# Altium PCB Mini-F1C200s.PcbDoc
Units mil, origin at the board's own origin, x right, y up, seen from the top; angles counter-clockwise.
Board outline 2362.8 x 1181.7 mil, 4 copper layers (Top Layer, GND, SGN, Bottom Layer), stack 23.756 mil thick; 69 components, 59 nets, 366 pads, 0 vias.
Unrouted connection lines stored in the file: 188.
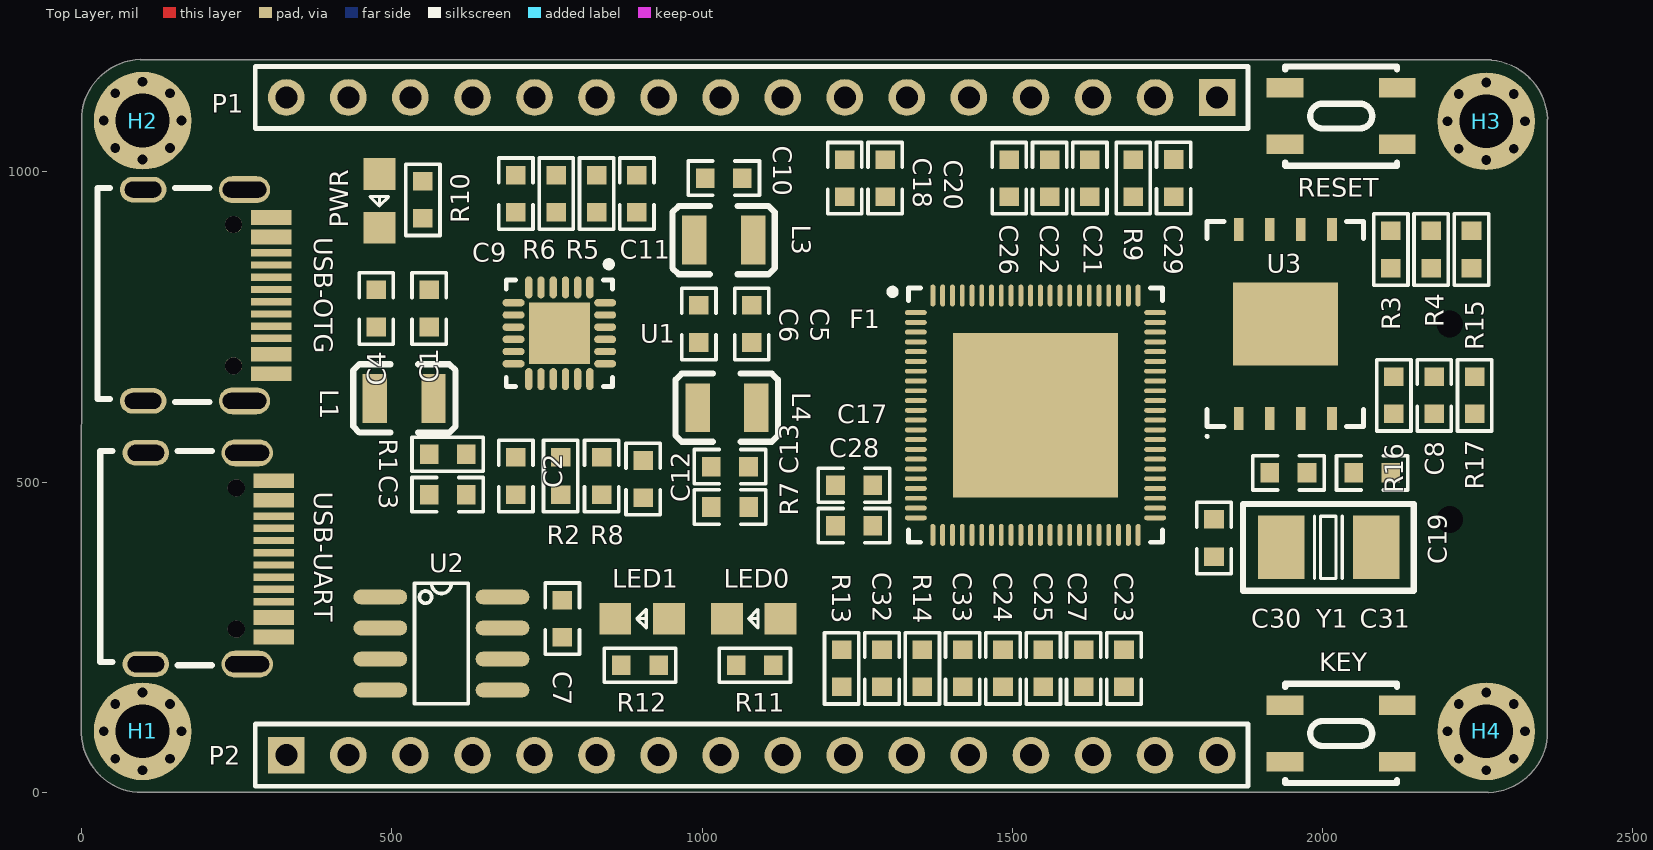
[diagram p0: Top Layer view]
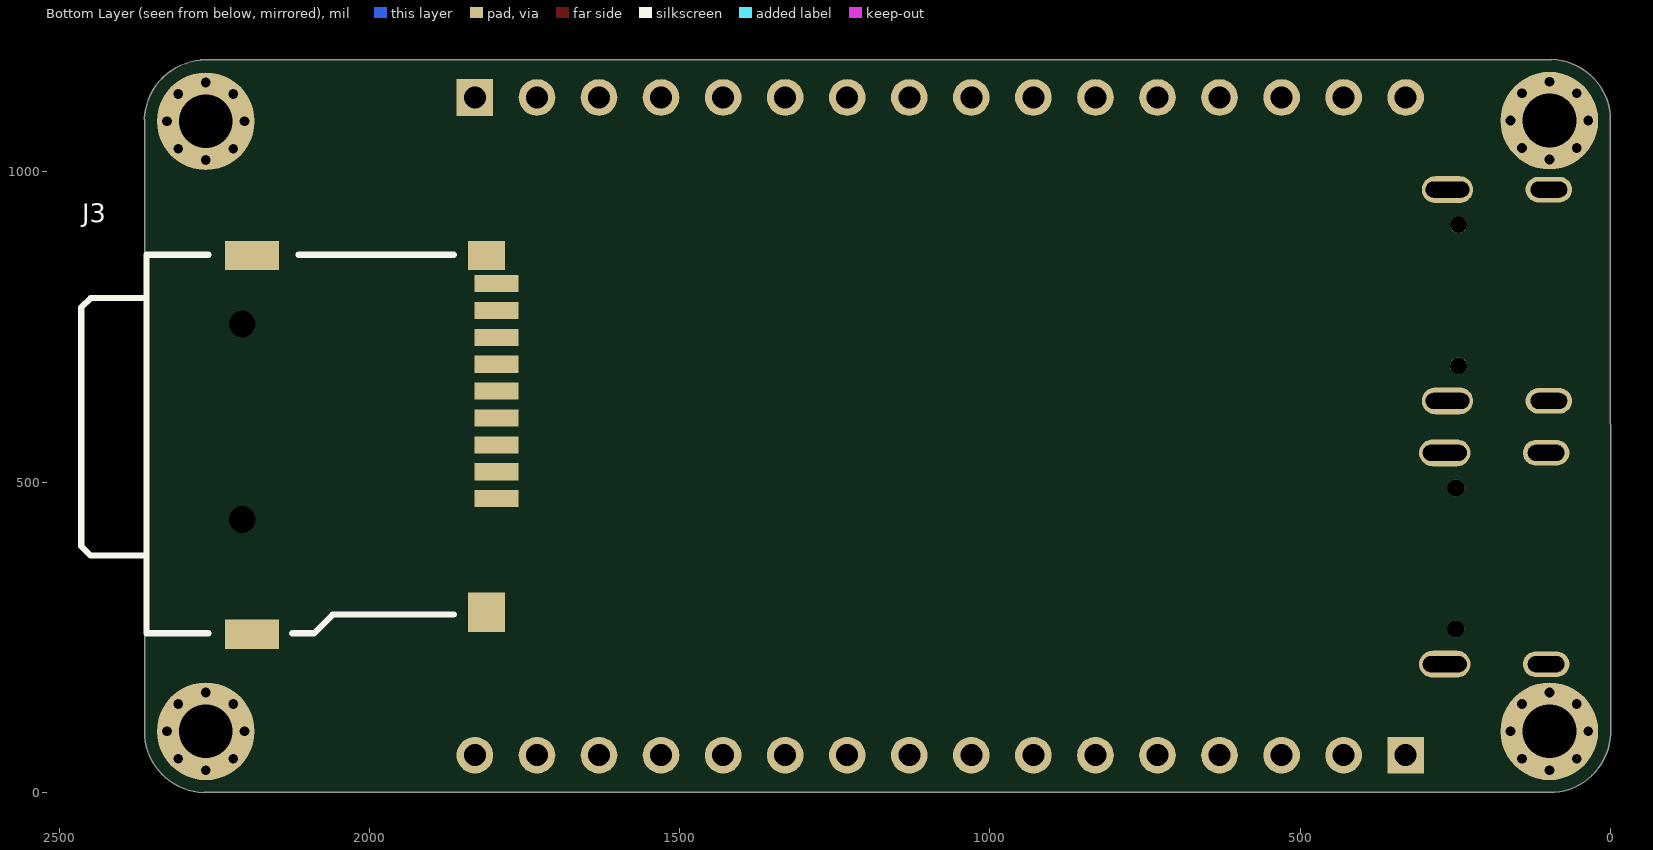
[diagram p1: Bottom Layer view, seen from below]
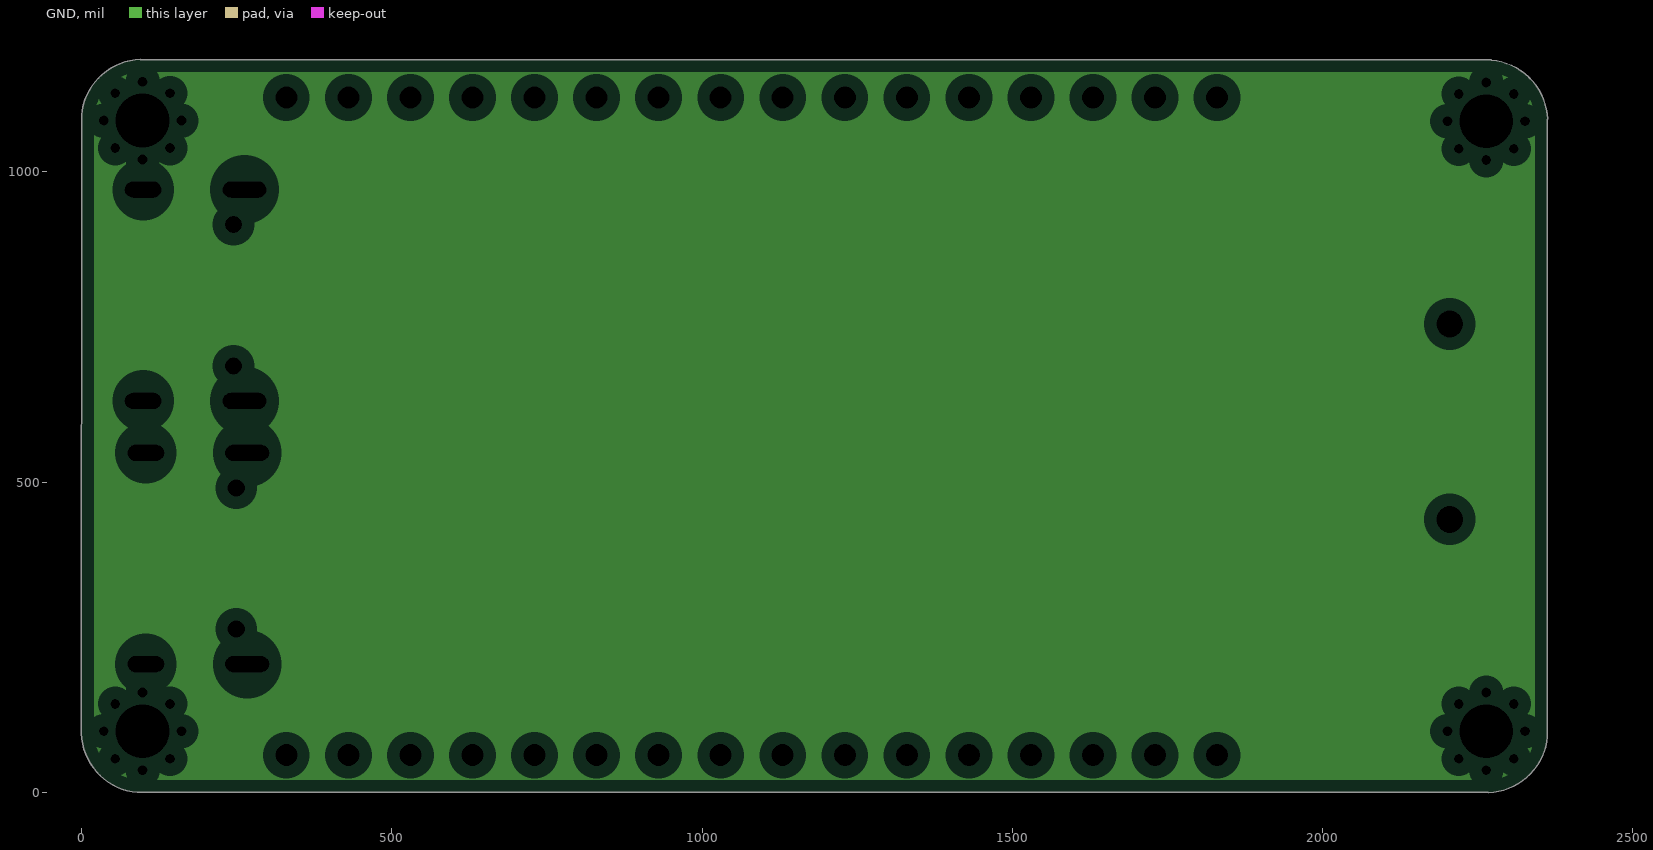
[diagram p2: GND, clearances drawn from the general rule]

## Layer stack, top to bottom
Top Solder: solder mask 0.4, Solder Resist, Dk 3.5
Top Layer: signal copper 1.4
Dielectric 2: prepreg 2.8, PP-006, Dk 4.1
GND: plane copper 1.378
Dielectric 1: dielectric 12.6, FR-4, Dk 4.8
SGN: signal copper 1.378
Dielectric 3: prepreg 2.8, PP-006, Dk 4.1
Bottom Layer: signal copper 1.4
Bottom Solder: solder mask 0.4, Solder Resist, Dk 3.5

## Board outline
-0.3,94.99 ccw(c98.43,98.43) 90,0 2267.22,0 2267.22,-0.3 ccw(c2263.78,98.43) 2362.2,90 2362.2,1085.01 2362.5,1085.01 ccw(c2263.78,1081.57) 2272.2,1180 2272.2,1181.1 94.99,1181.1 94.99,1181.4 ccw(c98.43,1082.68) 0,1091.1

## Design rules (kind name [scope] priority, off if disabled: settings)
Clearance [All] p1: gap=10 ignorepadtopadclearanceinfootprint=TRUE except(0: Arc-Hole Track-Hole SMDPad-Hole THPad-Hole Via-Hole Fill-Hole Poly-Hole Region-Hole Text-Hole; 6: Arc-Arc Arc-Track Arc-SMDPad Arc-THPad Arc-Via Track-Track Track-SMDPad Track-THPad Track-Via SMDPad-SMDPad SMDPad-THPad SMDPad-Via THPad-THPad THPad-Via Via-Via)
PlaneClearance [All] p1: clearance=20
PlaneConnect [All] p1: planeconnectstyle=Relief reliefexpansion=20 reliefentries=4 reliefconductorwidth=10 reliefairgap=10
PolygonConnect [All] p1: connectstyle=Relief reliefconductorwidth=10 reliefentries=4 polygonreliefangle="90 Angle" airgapwidth=10
RoutingVias [All] p1: holewidth=28 width=50 viastyle="Through Hole" minholewidth=28 minwidth=50 maxholewidth=28 maxwidth=50
SolderMaskExpansion [All] p1: expansion=4 istentingtop=FALSE
Width Width_PWR [InNetClass('PWR')] p1: maxlimit=10 minlimit=8 preferedwidth=10 midlayer1_minwidth=10 minimp=50.000000 maximp=50.000000 favimp=50.000000
Width [All] p2: maxlimit=10 minlimit=6 preferedwidth=10 toplayer_prefwidth=8 midlayer1_minwidth=10 bottomlayer_prefwidth=8 minimp=50.000000 maximp=50.000000 favimp=50.000000
28 further rules are at their usual default settings.

## Classes and differential pairs
net class PWR: UVCC VBUS VCC-CORE VCC-DRAM

## Components (designator, comment, footprint, x,y, rotation, side; value= is the part's Value field where it differs from the comment)
C1 "10uF(10%, 0603)" 0603C 560,780 r90 top value=100pF
C2 "22uF(10%, 0603)" 0603C 700,510 r90 top value=100pF
C3 "220pF(10%, 0603)" 0603C 590,480 r0 top value=100pF
C4 "10uF(10%, 0603)" 0603C 475,780 r270 top value=100pF
C5 "10uF(10%, 0603)" 0603C 1080,755 r90 top value=100pF
C6 "10uF(10%, 0603)" 0603C 995,755 r90 top value=100pF
C7 "2.2uF(10%, 0603)" 0603C 775,280 r270 top value=100pF
C8 "2.2uF(10%, 0603)" 0603C 2180,640 r90 top value=100pF
C9 "10uF(10%, 0603)" 0603C 700,965 r270 top value=100pF
C10 "22uF(10%, 0603)" 0603C 1035,990 r180 top value=100pF
C11 "220pF(10%, 0603)" 0603C 895,965 r270 top value=100pF
C12 "22uF(10%, 0603)" 0603C 905,505 r90 top value=100pF
C13 "220pF(10%, 0603)" 0603C 1044.92,525 r0 top value=100pF
C17 "100nF(10%, 0603)" 0603C 1245,495 r0 top value=100pF
C18 "100nF(10%, 0603)" 0603C 1230,990 r270 top value=100pF
C19 "100nF(10%, 0603)" 0603C 1825,410 r90 top value=100pF
C20 "10uF(10%, 0603)" 0603C 1295,990 r270 top value=100pF
C21 "10nF(10%, 0603)" 0603C 1625,989.92 r270 top value=100pF
C22 "10uF(10%, 0603)" 0603C 1495,989.92 r270 top value=100pF
C23 "100nF(10%, 0603)" 0603C 1680,200 r90 top value=100pF
C24 "1uF(10%, 0603)" 0603C 1485,200 r90 top value=100pF
C25 "10uF(10%, 0603)" 0603C 1550,200 r90 top value=100pF
C26 "100nF(10%, 0603)" 0603C 1560,989.92 r270 top value=100pF
C27 "100nF(10%, 0603)" 0603C 1615,200 r90 top value=100pF
C28 "100nF(10%, 0603)" 0603C 1245,430 r0 top value=100pF
C29 "1uF(10%, 0603)" 0603C 1760,990.08 r270 top value=100pF
C30 "18pF(10%, 0603)" 0603C 1945,515 r180 top value=100pF
C31 "18pF(10%, 0603)" 0603C 2080,515 r180 top value=100pF
C32 "100nF(10%, 0603)" 0603C 1290,200 r270 top value=100pF
C33 "100nF(10%, 0603)" 0603C 1420,200 r90 top value=100pF
F1 "U5" QFN127P600-8N 1537.36,607.91 r0 top
H1 "M2-Hole" M2-Hole 98.43,98.43 r0 top locked
H2 "M2-Hole" M2-Hole 98.43,1082.68 r0 top locked
H3 "M2-Hole" M2-Hole 2263.78,1081.57 r0 top locked
H4 "M2-Hole" M2-Hole 2263.78,98.43 r0 top locked
J3 "MicroTF-13P" MicroSD-13P-XunPu 2189.25,841.61 r270 bottom locked
KEY "SW-PB" SW2-4R2X3R4 2030,95 r180 top locked (schematic designator S2)
L1 "2.2uH(10%, 1206)" INDC-2520 520,635 r0 top value=10mH
L3 "2.2uH(10%, 1206)" INDC-2520 1035,890 r180 top value=10mH
L4 "2.2uH(10%, 1206)" INDC-2520 1040,620 r180 top value=10mH
LED0 "LED0" LED-0805 1110,290 r0 top (schematic designator D2)
LED1 "LED0" LED-0805 930,290 r0 top (schematic designator D3)
P1 "Header 16" HDR1X16 1830,1120 r180 top locked
P2 "Header 16" HDR1X16 330,60 r0 top locked
PWR "LED0" LED-0805 470,980.08 r90 top (schematic designator D1)
R1 "510K(1%, 0603)" 0603R 590,545 r0 top value=1K
R2 "110K(1%, 0603)" 0603R 772,509.92 r90 top value=1K
R3 "47K(1%, 0603)" 0603R 2110,875 r90 top value=1K
R4 "47K(1%, 0603)" 0603R 2175,875 r90 top value=1K
R5 "100K(1%, 0603)" 0603R 830,965 r270 top value=1K
R6 "150K(1%, 0603)" 0603R 765,965 r90 top value=1K
R7 "510K(1%, 0603)" 0603C 1045,460 r0 top value=1K
R8 "110K(1%, 0603)" 0603C 838,509.92 r90 top value=1K
R9 "Res1" 0603R 1695,990 r270 top value=1K
R10 "1K(1%, 0603)" 0603R 550,955.08 r270 top value=1K
R11 "1K(1%, 0603)" 0603R 1085,205 r180 top value=1K
R12 "1K(1%, 0603)" 0603R 900,205 r180 top value=1K
R13 "2K(1%, 0603)" 0603R 1225,200 r270 top value=1K
R14 "2K(1%, 0603)" 0603R 1355,200 r90 top value=1K
R15 "47K(1%, 0603)" 0603R 2240,875 r270 top value=1K
R16 "47K(1%, 0603)" 0603R 2115,640 r270 top value=1K
R17 "47K(1%, 0603)" 0603R 2245,640 r270 top value=1K
RESET "SW-PB" SW2-4R2X3R4 2030,1090 r0 top locked (schematic designator S1)
U1 "EA3036CBAR" QFN-4X4-24-EA3059 770,740 r270 top
U2 "CH340N" SOP8 580,240 r270 top
U3 "SPI NANDFLASH" SWON127P8 1940,755 r90 top
USB-OTG "USB-TYPEC-16P" USB-TYPEC-16P 205.72,784.22 r270 top (schematic designator J1)
USB-UART "USB-TYPEC-16P" USB-TYPEC-16P 210,360 r270 top (schematic designator J2)
Y1 "24MHz(10ppm, 3225)" SMD5032-2P 2010,395 r180 top

## Footprints (in the part's own frame and the unit in brackets; to place one, negate y for a bottom-side part, rotate by r counter-clockwise, add the part's x,y. Pads: shape width x height; smd on the part's side, far side on the other; paste and mask are expansions set on the pad)
0603C [mm]
  rect 0.76x0.8 smd: 1(-0.76,0) 2(0.76,0)
  silkscreen extent -1.46,-0.7 1.46,0.7, body extent -0.8,-0.4 0.8,0.4, height 0.3
0603R [mm]
  rect 0.76x0.8 smd: 1(-0.76,0) 2(0.76,0)
  silkscreen extent -1.46,-0.7 1.46,0.7, body extent -0.8,-0.41 0.8,0.41, height 0.45
HDR1X16 [mm] "Connector; Header; 16 Position"
  rect 1.5x1.5 hole 0.9: 1(0,0)
  round 1.5 hole 0.9: 2(2.54,0) 3(5.08,0) 4(7.62,0) 5(10.16,0) 6(12.7,0) 7(15.24,0) 8(17.78,0) 9(20.32,0) 10(22.86,0) 11(25.4,0) 12(27.94,0) 13(30.48,0) 14(33.02,0) 15(35.56,0) 16(38.1,0)
  silkscreen extent -1.27,-1.27 39.37,1.27
INDC-2520 [mm]
  rect 1x2 smd: 1(-1.2,0) 2(1.2,0)
  silkscreen extent -2.09,-1.4 2.1,1.4, body extent -1.25,-1 1.25,1, height 0.9
LED-0805 [mm]
  rect 1.3x1.3 smd: 1(-1.778,-0.254) 2(0.422,-0.254)
  silkscreen extent -0.89,-0.64 -0.51,0.13, body extent -1.77,-0.88 0.25,0.37, height 1.1
M2-Hole [mm] "5mm~2.5mm"
  round 0.8 hole 0.4: 4(0,1.587) 5(1.123,1.123) 6(1.587,0) 7(1.123,-1.123) 8(0,-1.587) 9(-1.123,-1.123) 10(-1.587,0) 11(-1.123,1.123)
  round 4 hole 2.2 unplated: 12(0,0)
MicroSD-13P-XunPu [mm]
  round 1 hole 1.1 unplated: 0(2.2,-0.4) 0(10.2,-0.4)
  rect 0.7x1.8 smd: 1(9.35,10) 2(8.25,10) 3(7.15,10) 4(6.05,10) 5(4.95,10) 6(3.85,10) 7(2.75,10) 8(1.65,10) 9(0.55,10)
  rect 1.2x2.2 smd: 10(-0.6,0) 11(14.9,0)
  rect 1.6x1.5 smd: 12(14,9.6)
  rect 1.2x1.5 smd: 13(-0.6,9.6)
  silkscreen extent -0.64,-6.99 14.86,8.25, body extent -1.02,-6.74 15.08,10.55, height 1.85
QFN127P600-8N [mm] "Allwiner new embedded processor with arm-a9"
  oval 0.9x0.2 smd: 1(-4.9,4.2) 2(-4.9,3.8) 3(-4.9,3.4) 4(-4.9,3) 5(-4.9,2.6) 6(-4.9,2.2) 7(-4.9,1.8) 8(-4.9,1.4) 9(-4.9,1) 10(-4.9,0.6) 11(-4.9,0.2) 12(-4.9,-0.2) 13(-4.9,-0.6) 14(-4.9,-1) 15(-4.9,-1.4) 16(-4.9,-1.8) 17(-4.9,-2.2) 18(-4.9,-2.6) 19(-4.9,-3) 20(-4.9,-3.4) 21(-4.9,-3.8) 22(-4.9,-4.2) 45(4.9,-4.2) 46(4.9,-3.8) 47(4.9,-3.4) 48(4.9,-3) 49(4.9,-2.6) 50(4.9,-2.2) 51(4.9,-1.8) 52(4.9,-1.4) 53(4.9,-1) 54(4.9,-0.6) 55(4.9,-0.2) 56(4.9,0.2) 57(4.9,0.6) 58(4.9,1) 59(4.9,1.4) 60(4.9,1.8) 61(4.9,2.2) 62(4.9,2.6) 63(4.9,3) 64(4.9,3.4) 65(4.9,3.8) 66(4.9,4.2)
  oval 0.2x0.9 smd: 23(-4.2,-4.9) 24(-3.8,-4.9) 25(-3.4,-4.9) 26(-3,-4.9) 27(-2.6,-4.9) 28(-2.2,-4.9) 29(-1.8,-4.9) 30(-1.4,-4.9) 31(-1,-4.9) 32(-0.6,-4.9) 33(-0.2,-4.9) 34(0.2,-4.9) 35(0.6,-4.9) 36(1,-4.9) 37(1.4,-4.9) 38(1.8,-4.9) 39(2.2,-4.9) 40(2.6,-4.9) 41(3,-4.9) 42(3.4,-4.9) 43(3.8,-4.9) 44(4.2,-4.9) 67(4.2,4.9) 68(3.8,4.9) 69(3.4,4.9) 70(3,4.9) 71(2.6,4.9) 72(2.2,4.9) 73(1.8,4.9) 74(1.4,4.9) 75(1,4.9) 76(0.6,4.9) 77(0.2,4.9) 78(-0.2,4.9) 79(-0.6,4.9) 80(-1,4.9) 81(-1.4,4.9) 82(-1.8,4.9) 83(-2.2,4.9) 84(-2.6,4.9) 85(-3,4.9) 86(-3.4,4.9) 87(-3.8,4.9) 88(-4.2,4.9)
  rect 6.74x6.74 smd: 89(0,0)
  silkscreen extent -5.97,-5.2 5.2,5.2, body extent -5.05,-5.05 5.05,5.05, height 0.85
QFN-4X4-24-EA3059 [mm] "QFN, 24-Leads, Body 4.00x4.00mm, Pitch 0.50mm, Thermal Pad 2.50x2.50mm, IPC Medium Density"
  oval 0.9x0.3 smd: 1(-1.875,1.25) 2(-1.875,0.75) 3(-1.875,0.25) 4(-1.875,-0.25) 5(-1.875,-0.75) 6(-1.875,-1.25) 13(1.875,-1.25) 14(1.875,-0.75) 15(1.875,-0.25) 16(1.875,0.25) 17(1.875,0.75) 18(1.875,1.25)
  oval 0.3x0.9 smd: 7(-1.25,-1.875) 8(-0.75,-1.875) 9(-0.25,-1.875) 10(0.25,-1.875) 11(0.75,-1.875) 12(1.25,-1.875) 19(1.25,1.875) 20(0.75,1.875) 21(0.25,1.875) 22(-0.25,1.875) 23(-0.75,1.875) 24(-1.25,1.875)
  rect 2.5x2.5 smd: 25(0,0)
  silkscreen extent -2.95,-2.17 2.17,2.17, body extent -2.02,-2.02 2.02,2.02, height 1
SMD5032-2P [mm] "Ctrystal, 2-Pin, package with 5032"
  rect 1.9x2.6 smd: 1(-1.95,0) 2(1.95,0)
  silkscreen extent -3.47,-1.78 3.51,1.78, body extent -2.5,-1.6 2.5,1.6, height 1.3
SOP8 [mm]
  oval 0.6x2.2 smd: 1(-1.905,-2.5) 2(-0.635,-2.5) 3(0.635,-2.5) 4(1.905,-2.5) 5(1.905,2.5) 6(0.635,2.5) 7(-0.635,2.5) 8(-1.905,2.5)
  silkscreen extent -2.46,-1.1 2.46,1.1, body extent -2.5,-3 2.5,3, height 1.8
SW2-4R2X3R4 [mm] "TS3425 Shouhan"
  rect 1.5x0.8 smd: 1(-2.3,-1.15) 1(2.3,-1.15) 2(-2.3,1.15) 2(2.3,1.15)
  silkscreen extent -2.29,-2.03 2.29,2.03, body extent -2.3,-1.68 2.3,1.68, height 2.5
SWON127P8 [mm] "SON, 8-Leads, Body 6.00x8.00mm, Pitch 1.27mm, Thermal Pad 4.30x3.40mm, IPC Medium Density"
  rect 0.95x0.4 smd: 1(-3.87,1.905) 2(-3.87,0.635) 3(-3.87,-0.635) 4(-3.87,-1.905) 5(3.87,-1.905) 6(3.87,-0.635) 7(3.87,0.635) 8(3.87,1.905)
  rect 3.4x4.3 smd paste-1.7: 9(0,0)
  silkscreen extent -4.65,-3.2 4.2,3.25, body extent -4.05,-3.05 4.05,3.05, height 0.75
USB-TYPEC-16P [mm]
  oval 1.1x2.1 hole 0.65 slot 1.8 at 90 deg mask+0.051: 13(-4.757,1.448) 15(3.893,1.448)
  oval 1.05x1.9 hole 0.65 slot 1.5 at 90 deg mask+0.051: 14(-4.757,-2.702) 16(3.893,-2.702)
  round 0.7 hole 0.7 unplated mask+0.102: 22(-3.322,0.998) 23(2.458,0.998)
  rect 0.6x1.651 smd: A1B12(-3.617,2.54) A4B9(-2.817,2.54) A9B4(1.983,2.54) A12B1(2.783,2.54)
  rect 0.3x1.651 smd: A5(-1.667,2.54) A6(-0.667,2.54) A7(-0.167,2.54) A8(0.833,2.54) B5(1.333,2.54) B6(0.333,2.54) B7(-1.167,2.54) B8(-2.167,2.54)
  silkscreen extent -4.83,-4.57 3.94,0, body extent -4.85,-5.27 4.09,2.63, height 3.26

## Part data
C1 C2 C3 C4 C5 C6 C7 C8 C9 C10 C11 C12 C13 C17 C18 C19 C20 C21 C22 C23 C24 C25 C26 C27 C28 C29 C30 C31 C32 C33: library part Cap, "Capacitor", LatestRevisionDate=17-Jul-2002, LatestRevisionNote="Re-released for DXP Platform.", PackageDescription="Radial Cap, Thru-Hole; 2 Leads; 0.3 in Pin Spacing", PackageReference=RAD-0.3, Published=8-Jun-2000, Publisher="Altium Limited"
F1: library part F1Cx00s
J3: "XunPu Micro-SD card slot,  lable: TF-115"
KEY RESET: "Switch", LatestRevisionDate=17-Jul-2002, LatestRevisionNote="Re-released for DXP Platform.", PackageDescription="Switch; 2 Leads", PackageReference=SPST-2, Published=24-Mar-1999, Publisher="Altium Limited"
L1 L3 L4: library part Inductor, "Inductor", Code_IEC=1005, Code_JEITA=0402, LatestRevisionDate=29-May-2009, LatestRevisionNote="IPC-7351 Footprint Added.", PackageDescription="Chip Inductor", PackageReference=0402-A, Published=8-Jun-2000, Publisher="Altium Limited"
LED0 LED1 PWR: "Typical INFRARED GaAs LED", LatestRevisionDate=08-Jul-2005, LatestRevisionNote="Mech Layer 1 removed.", PackageDescription="LED; 2 Leads", PackageReference=LED-0, Published=8-Jun-2000, Publisher="Altium Limited"
P1 P2: "Header, 16-Pin", LatestRevisionDate=17-Jul-2002, LatestRevisionNote="Re-released for DXP Platform.", Publisher="Altium Limited"
R1 R2 R3 R4 R5 R6 R7 R8 R10 R11 R12 R13 R14 R15 R16 R17: library part Res1, "Resistor", LatestRevisionDate=17-Jul-2002, LatestRevisionNote="Re-released for DXP Platform.", PackageDescription="Axial Device, Thru-Hole; 2 Leads; 0.3 in Pin Spacing", PackageReference=AXIAL-0.3, Published=8-Jun-2000, Publisher="Altium Limited"
R9: "Resistor", LatestRevisionDate=17-Jul-2002, LatestRevisionNote="Re-released for DXP Platform.", PackageDescription="Axial Device, Thru-Hole; 2 Leads; 0.3 in Pin Spacing", PackageReference=AXIAL-0.3, Published=8-Jun-2000, Publisher="Altium Limited"
U1: library part EA3059
U2: "UART To USB"
U3: library part XT26G10C
Y1: library part XTAL, "Crystal Oscillator", LatestRevisionDate=17-Jul-2002, LatestRevisionNote="Re-released for DXP Platform.", PackageDescription="Crystal, Thru-Hole; 2 Leads; Body 3.1 x 8.2 mm (Dia.xH)", PackageReference=R38, Published=8-Jun-2000, Publisher="Altium Limited"

## Nets (pads, with @x,y where several pads share a name; then routed paths per layer and width w, separated by ;. In a path a pad name is that pad's centre, name@x,y a point inside that pad or via, vN(x,y) a via of type N, cw(c..) or ccw(c..) an arc to the next point about the centre after c; other vN are vias at no path point)
GND: C1.2 C2.2 C4.1 C5.1 C6.1 C7.2 C8.2 C9.1 C10.2 C12.1 C17.1 C18.1 C19.1 C20.1 C21.1 C22.1 C23.1 C24.1 C25.1 C26.1 C27.1 C28.1 C29.2 C30.2 C31.2 C33.1 F1.2 F1.74 F1.82 F1.89 J3.6 KEY.2 LED0.2 LED1.2 P1.15 P1.16 P2.13 P2.14 P2.15 P2.16 PWR.2 R2.1 R6.2 R8.1 R14.1 RESET.2 U1.1 U1.4 U1.6 U1.13 U1.18 U1.25 U2.3 U3.4 USB-OTG.A1B12 USB-OTG.A12B1 USB-UART.A4B9 USB-UART.A12B1
HOSC-IN: C31.1 F1.52 Y1.1
HOSC-OUT: C30.1 F1.51 Y1.2
KEY0: F1.44 KEY.1
LCD-CLK: F1.26 P2.9
LCD-DAT2: F1.6 P1.3
LCD-DAT3: F1.7 P1.4
LCD-DAT4: F1.8 P1.5
LCD-DAT5: F1.9 P1.6
LCD-DAT6: F1.10 P1.7
LCD-DAT7: F1.11 P1.8
LCD-DAT10: F1.12 P1.9
LCD-DAT11: F1.13 P1.10
LCD-DAT12: F1.14 P1.11
LCD-DAT13: F1.15 P1.12
LCD-DAT14: F1.16 P1.13
LCD-DAT15: F1.17 P1.14
LCD-DAT18: F1.18 P2.3
LCD-DAT19: F1.19 P2.4
LCD-DAT20: F1.21 P2.5
LCD-DAT21: F1.23 P2.6
LCD-DAT22: F1.24 P2.7
LCD-DAT23: F1.25 P2.8
LCD-DE: F1.27 P2.10
LCD-HSYNC: F1.28 P2.11
LCD-VSYNC: F1.29 P2.12
LEDC0: F1.45 R11.1
LEDC1: F1.46 R12.1
NetC3_2: C3.2 R1.2 R2.2 U1.14
NetC11_2: C11.2 R5.2 R6.1 U1.2
NetC13_1: C13.1 R7.1 R8.2 U1.17
NetD1_1: PWR.1 R10.2
NetD2_1: LED0.1 R11.2
NetD3_1: LED1.1 R12.2
NetL1_2: L1.2 U1.12
NetL3_2: L3.2 U1.24
NetL4_2: L4.2 U1.19
RESET: C29.1 F1.70 R9.1 RESET.1
SDC0-CLK: F1.56 J3.5
SDC0-CMD: F1.55 J3.3 R3.1
SDC0-DAT0: F1.57 J3.7 R4.1
SDC0-DAT1: F1.58 J3.8 R15.1
SDC0-DAT2: F1.53 J3.2 R16.1
SDC0-DAT3: F1.54 J3.1 R17.1
SPI0-CLK: F1.59 U3.6
SPI0-CS: F1.60 U3.1
SPI0-MISO: F1.61 U3.2
SPI0-MOSI: F1.62 U3.5
SVREF: C32.1 C33.2 F1.33 R13.1 R14.2
UART-DN: U2.2 USB-UART.A7 USB-UART.B7
UART-DP: U2.1 USB-UART.A6 USB-UART.B6
UART-RXD: F1.41 U2.6
UART-TXD: F1.42 U2.7
USBDN: F1.68 USB-OTG.A7 USB-OTG.B7
USBDP: F1.69 USB-OTG.A6 USB-OTG.B6
UVCC: C2.1 C3.1 C7.1 C8.1 C17.2 C18.2 C19.2 C20.2 C21.2 C22.2 C32.2 F1.4 F1.5 F1.20 F1.50 F1.67 F1.73 J3.4 L1.1 P1.1 P1.2 P2.1 P2.2 R1.1 R3.2 R4.2 R9.2 R10.1 R13.2 R15.2 R16.2 R17.2 U2.5 U2.8 U3.3 U3.7 U3.8
VBUS: C1.1 C4.2 C5.2 C6.2 C9.2 U1.3 U1.8 U1.9 U1.10 U1.11 U1.20 U1.21 U1.22 U1.23 USB-OTG.A4B9 USB-OTG.A9B4 USB-UART.A1B12 USB-UART.A9B4
VCC-CORE: C10.1 C11.1 C26.2 C27.2 C28.2 F1.22 F1.35 F1.71 L3.1 R5.1
VCC-DRAM: C12.2 C13.2 C23.2 C24.2 C25.2 F1.30 F1.31 F1.32 F1.34 F1.36 F1.80 L4.1 R7.2
pads on no net: F1.1 F1.3 F1.37 F1.38 F1.39 F1.40 F1.43 F1.47 F1.48 F1.49 F1.63 F1.64 F1.65 F1.66 F1.72 F1.75 F1.76 F1.77 F1.78 F1.79 F1.81 F1.83 F1.84 F1.85 F1.86 F1.87 F1.88 H1.4 H1.5 H1.6 H1.7 H1.8 H1.9 H1.10 H1.11 H1.12 H2.4 H2.5 H2.6 H2.7 H2.8 H2.9 H2.10 H2.11 H2.12 H3.4 H3.5 H3.6 H3.7 H3.8 H3.9 H3.10 H3.11 H3.12 H4.4 H4.5 H4.6 H4.7 H4.8 H4.9 H4.10 H4.11 H4.12 J3.0 J3.9 J3.10 J3.11 J3.12 J3.13 U1.5 U1.7 U1.15 U1.16 U2.4 U3.9 USB-OTG.13 USB-OTG.14 USB-OTG.15 USB-OTG.16 USB-OTG.22 USB-OTG.23 USB-OTG.A5 USB-OTG.A8 USB-OTG.B5 USB-OTG.B8 USB-UART.13 USB-UART.14 USB-UART.15 USB-UART.16 USB-UART.22 USB-UART.23 USB-UART.A5 USB-UART.A8 USB-UART.B5 USB-UART.B8

## Polygon pours and split planes (outlines as drawn)
no net on GND (split plane): 94.99,1161.01 2265.92,1161.01 2268.28,1160.29 2268.62,1160.26 2270.5,1160.07 2270.49,1160.03 2271.44,1159.98 2271.56,1159.97 2279.15,1158.84 2286.65,1156.96 2293.93,1154.36 2300.92,1151.05 2307.55,1147.08 2313.76,1142.47 2319.49,1137.28 2324.68,1131.55 2329.28,1125.34 2333.26,1118.71 2336.56,1111.72 2339.17,1104.44 2341.05,1096.94 2342.18,1089.3 2342.3,1086.93 2342.11,1085.01 2342.11,90.22 2341.05,83.06 2339.17,75.56 2336.56,68.28 2333.26,61.29 2329.28,54.66 2324.68,48.45 2319.49,42.72 2313.76,37.53 2307.55,32.92 2300.92,28.95 2293.93,25.64 2286.65,23.04 2279.15,21.16 2271.5,20.02 2269.13,19.91 2267.22,20.1 90.22,20.1 83.06,21.16 75.56,23.04 68.28,25.64 61.29,28.95 54.66,32.92 48.45,37.53 42.72,42.72 37.53,48.45 32.92,54.66 28.95,61.29 25.64,68.28 23.04,75.56 21.16,83.06 20.02,90.7 19.8,95.34 20.1,1090.89 21.16,1098.05 23.04,1105.55 25.64,1112.82 28.95,1119.81 32.92,1126.45 37.53,1132.65 42.72,1138.38 48.45,1143.57 54.66,1148.18 61.29,1152.15 68.28,1155.46 75.56,1158.06 83.06,1159.94 90.7,1161.08 93.07,1161.19

## Silkscreen, mask and mechanical layers (free items; w line width, h text height)
Mechanical 1:
  lines w10: -5,593.05 -1.95,590 ; -0.3,94.99 ccw(c98.43,98.43) 90,0 2267.22,0 ; 0,94.99 0,1091.1 cw(c98.43,1082.68) 94.99,1181.4 ; 3.05,590 395,590 2359.71,590 ; 94.99,1181.1 2272.2,1181.1 ; 1178.61,0 1179.86,1.25 1179.86,590 1179.86,1177.36 1183.6,1181.1 ; 2267.22,-0.3 ccw(c2263.78,98.43) 2362.2,90 2362.2,1085.01 ; 2272.2,1180 cw(c2263.78,1081.57) 2362.5,1085.01